# Altium PCB Drone Project.PcbDoc (part 2 of 2)
Units mm, origin at the board's own origin, x right, y up, seen from the top; angles counter-clockwise.
Board outline 39 x 39 mm, 4 copper layers (Top Layer, Int1 (GND), Int2 (GND_2), Bottom Layer), stack 1.564 mm thick; 49 components, 40 nets, 218 pads, 52 vias.
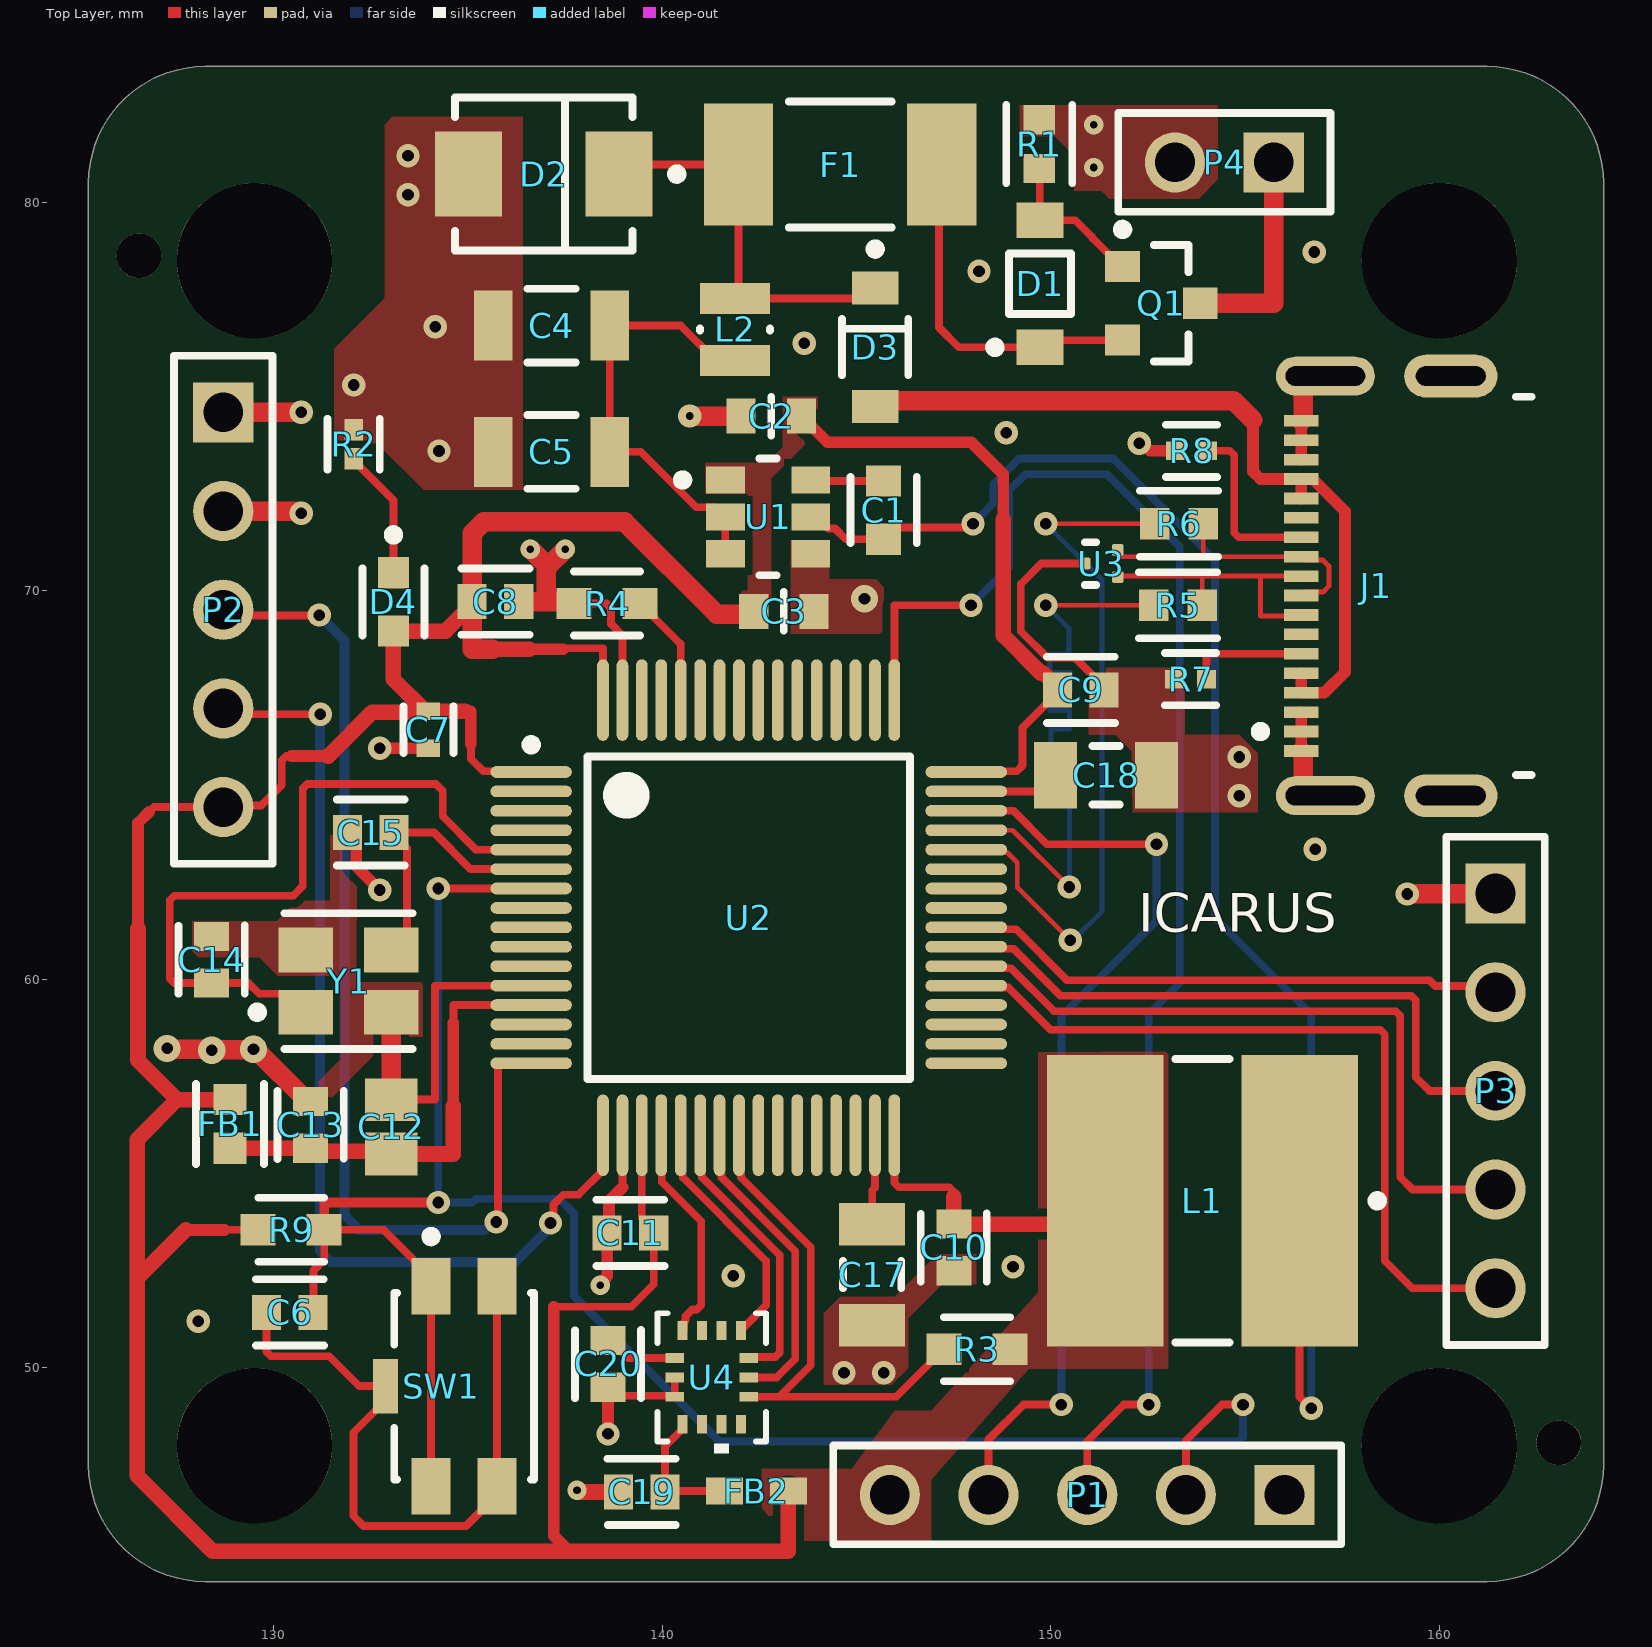
[diagram p0: Top Layer view]

## Polygon pours and split planes (outlines as drawn) (continued)
GND on Top Layer "GND_L01_P026" (solid, pour order 26): 143.3,71.3 144.3,71.3 144.3,70.3 145.5,70.3 145.7,70.1 145.7,69 145.6,68.9 143.3,68.9
3V3 on Top Layer "3V3_L01_P022" (solid, pour order 22): 144,75 143.1,75 143.1,73.7 142.7,73.3 141.1,73.3 141.1,72.5 142.2,72.5 142.2,70 142,70 141.9,69.9 141.9,68.9 142.7,68.9 142.8,69 142.8,72.9 144,74.1
GND on Int2 (GND_2) "GND_L03_P017" (solid, pour order 17): 126.086,80.431 cw(c128.626,80.431) 128.626,82.971 161.074,82.971 cw(c161.074,80.431) 163.614,80.431 163.614,47.524 cw(c161.074,47.524) 161.074,44.984 128.626,44.984 cw(c128.626,47.524) 126.086,47.524 126.086,48.184
GND on Int1 (GND) "GND_L02_P016" (solid, pour order 16): 126,80.447 cw(c128.54,80.447) 128.54,82.987 160.987,82.987 cw(c160.987,80.447) 163.527,80.447 163.527,47.54 cw(c160.987,47.54) 160.987,45 128.54,45 cw(c128.54,47.54) 126,47.54 126,48.2

## Silkscreen, mask and mechanical layers (free items; w line width, h text height)
Top Overlay:
  text "ICARUS" at 152.254,61.229 h1
Mechanical 1:
  the board outline again, w0.254